# EAGLE board GeniusScreenHolder (EAGLE 9.6.2)

Size 42.04 x 27.3 mm. Coordinates in mm from the lower left corner, seen from the top.
Outline: 42.04,0 0,0 0,27.3 42.04,27.3 42.04,0
Copper layers (1*16): Top 0.035mm / dielectric 1.5mm / Bottom 0.035mm
Design rules "SeeedStudio_2layer_DRU_no_angle_20140221": minimum track width 6mil, minimum drill 12mil, track to track 6mil, track to pad 6mil, pad to pad 6mil, via to via 6mil, smd to smd 0mil, copper to edge 10mil, drill to drill 10mil, minimum pad ring 10mil, minimum via ring 6mil, stop-mask expansion 2mil, vias tented up to drill 100mil, thermal gap 10mil
Net classes: 1 power: width 0.178 mm, drill 0.305 mm, clearance 0.178 mm to class 0, clearance 0.178 mm

## Footprints (pad centres in the part's own frame; a part is rotated, then mirrored left to right if it is on the bottom)
OLED_128X64_1_54 = drill 1.016: P$1 -2.54,-1.27; P$2 0,-1.27; P$3 2.54,-1.27; P$4 -2.54,-3.81; P$5 0,-3.81; P$6 2.54,-3.81

## Placement (x,y rotation side)
HLD2  SCREEN_HOLDER  [OLED_128X64_1_54]  20.95,15.49 0 top

## Library data of the parts
HLD2 = Rebel

## Text on the board
bPlace: Screen Holder Rev02 | Rebel Technology